# EAGLE board Flywheel Sensor PCB (EAGLE 9.7.0)
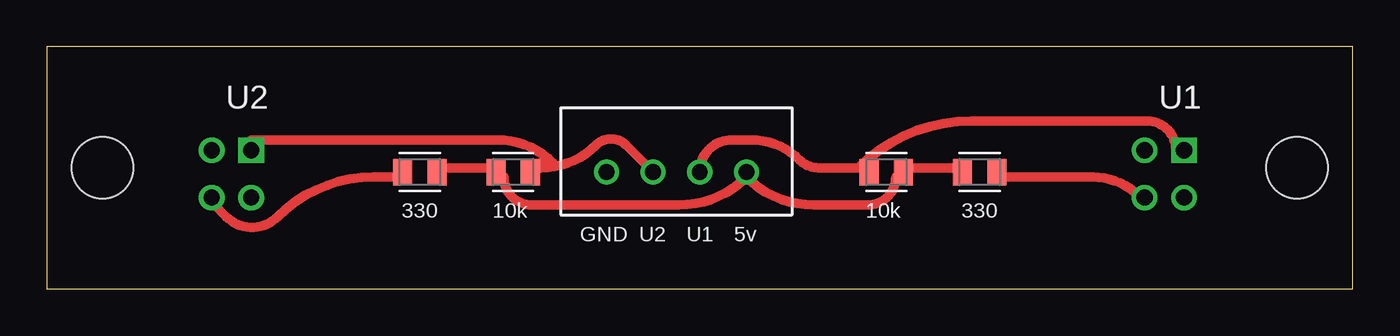
[diagram p0: board, top side]
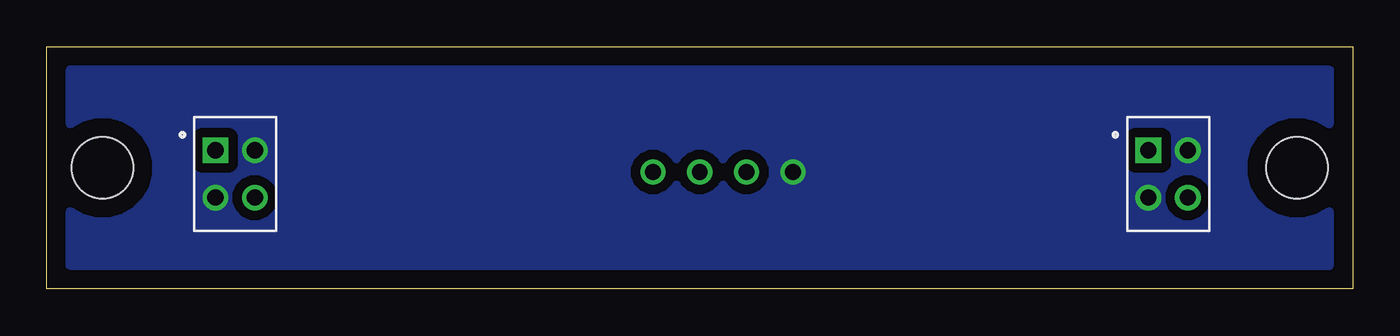
[diagram p1: board, bottom side, seen from below]

Size 70 x 13 mm. Coordinates in mm from the lower left corner, seen from the top.
Outline: 0,0 70,0 70,13 0,13 0,0
Copper layers (1*16): Top / Bottom
Stack-up Default Layer Stack: Top User Defined 0.035mm / Dielectric-1 User Defined 1.5mm / Bottom User Defined 0.035mm
Design rules: minimum copper width class=0 0.5mm, minimum copper width 6mil, minimum drill size 0.35mm, copper clearance class=0 to class=0 0.5mm, copper clearance wire_polygon to wire_polygon 6mil, copper clearance wire_polygon to pad_smd 6mil, copper clearance wire_polygon to via 6mil, copper clearance pad_smd to pad_smd 6mil, copper clearance pad_smd to via 6mil, copper clearance via to via 6mil, copper clearance smd to pad (same net) 6mil, copper clearance smd to via (same net) 6mil, copper clearance smd to smd (same net) 6mil, dimension clearance 40mil, via restrict clearance 0mil, restrict clearance 0mil, drill distance 6mil, keepout clearance 0mil
Net classes: 0 default: width 0.5 mm, clearance 0.5 mm
Holes 3.3 mm at 3,6.5 67,6.5

## Footprints (pad centres in the part's own frame; a part is rotated, then mirrored left to right if it is on the bottom)
B4B-XH-A = drill 0.84: 1 0,0; 2 2.5,0; 3 5,0; 4 7.5,0
RESC2012X65 = smd 1.031 x 1.42: 1 -0.919,0; 2 0.919,0
ONS_QRD1114 = drill 0.87 square: 1 -0.955,1.17 | drill 0.87: 2 -0.955,-1.37; 3 1.155,-1.37; 4 1.155,1.17

## Placement (x,y rotation side)
J1  B4B-XH-A  [B4B-XH-A]  30,6.27 0 top
R1  10k  [RESC2012X65]  45,6.27 180 top
R2  330  [RESC2012X65]  50,6.27 0 top
R3  10k  [RESC2012X65]  25,6.27 0 top
R4  330  [RESC2012X65]  20,6.27 180 top
U1  QRD1114  [ONS_QRD1114]  60,6.27 0 bottom
U2  QRD1114  [ONS_QRD1114]  10,6.27 0 bottom

## Library data of the parts
J1 = Connector; CATEGORY: Header; DSECRIPTION: Connector Header Through Hole 4 position 0.098" (2.50mm); MANUFACTURER: JST Sales America Inc.; MPN: B4B-XH-A(LF)(SN); OPERATING_TEMPERATURE: -25 C to 85 C; PART_STATUS: ACTIVE; PITCH: 0.098" (2.50mm); ROHS_COMPLIANCE: ROHS3 Compliant; SERIES: XH; SUB_CATEGORY: Rectangular Connectors; TYPE: Header, Male Pin, Board to Cable/Wire, Through Hole
R1-R4 = Resistor; CATEGORY: Resistor; SUB-CATEGORY: Fixed
U1 U2 = Library; AVAILABILITY: In Stock; CHECK_PRICES: https://www.snapeda.com/parts/QRD1114/Fairchild+Semiconductor/view-part/?ref=eda; DESCRIPTION: Optical Switches, Reflective, Phototransistor Output PHOTO TRANS; MF: ON Semiconductor / Fairchild; MP: QRD1114; PACKAGE: NON-STANDARD-4 ON Semiconductor; PRICE: None; SNAPEDA_LINK: https://www.snapeda.com/parts/QRD1114/Fairchild+Semiconductor/view-part/?ref=snap

## Nets
+5V: J1.4 R1.1 R2.1 R3.1 R4.1
GND: J1.1 U1.2 U1.4 U2.2 U2.4
N$1: J1.2 R3.2 U2.1
N$2: R4.2 U2.3
N$3: J1.3 R1.2 U1.1
N$4: R2.2 U1.3

## Tracks (layer width: path | path; a pad name or v marks a point on that pad's centre or on a via)
+5V
  Top 0.5: R2.1 49,6.5 46,6.5 R1.1 45.5,6 arc-90 44,4.5 41.12,4.5 arc-45 37.5,6 | R4.1 21,6.5 24,6.5 R3.1 24.5,6 arc90 26,4.5 33.88,4.5 arc45 37.5,6 | 37.5,6 J1.4 37.5,6
GND
  pour Bottom (isolate 0.305, no thermals): 0,12.7 0,0 69.85,0 69.85,12.7
N$1
  Top 0.5: 32.5,6.5 J1.2 31.06,7.71 arc90 29.43,7.71 | U2.1 10.96,8 24.15,8 arc-45 27.14,6.76 26.41,6.76 R3.2 26,6.5 26.5,6.5 arc45 29.43,7.71 | 29.43,7.71
N$2
  Top 0.5: R4.2 19,6 17.51,6 arc45 12.37,3.87 arc-90 9.63,3.87 9,4.5 U2.3
N$3
  Top 0.5: 43.5,6.5 41.36,6.5 arc-45 40.35,6.92 arc45 37.74,8 36.73,8 arc90 J1.3 | 43.5,6.5 44,6.5 R1.2 | 43.5,6.5 arc-45 49.54,9 59,9 arc-90 60.5,7.5 U1.1
N$4
  Top 0.5: R2.2 51,6 56.09,6 arc-45 58.5,5 U1.3

## Text on the board
SilkscreenTop: 330 | 10k | 10k | 330 | GND | U2 | U1 | 5v